# EAGLE board untitled2 (EAGLE 9.6.2)
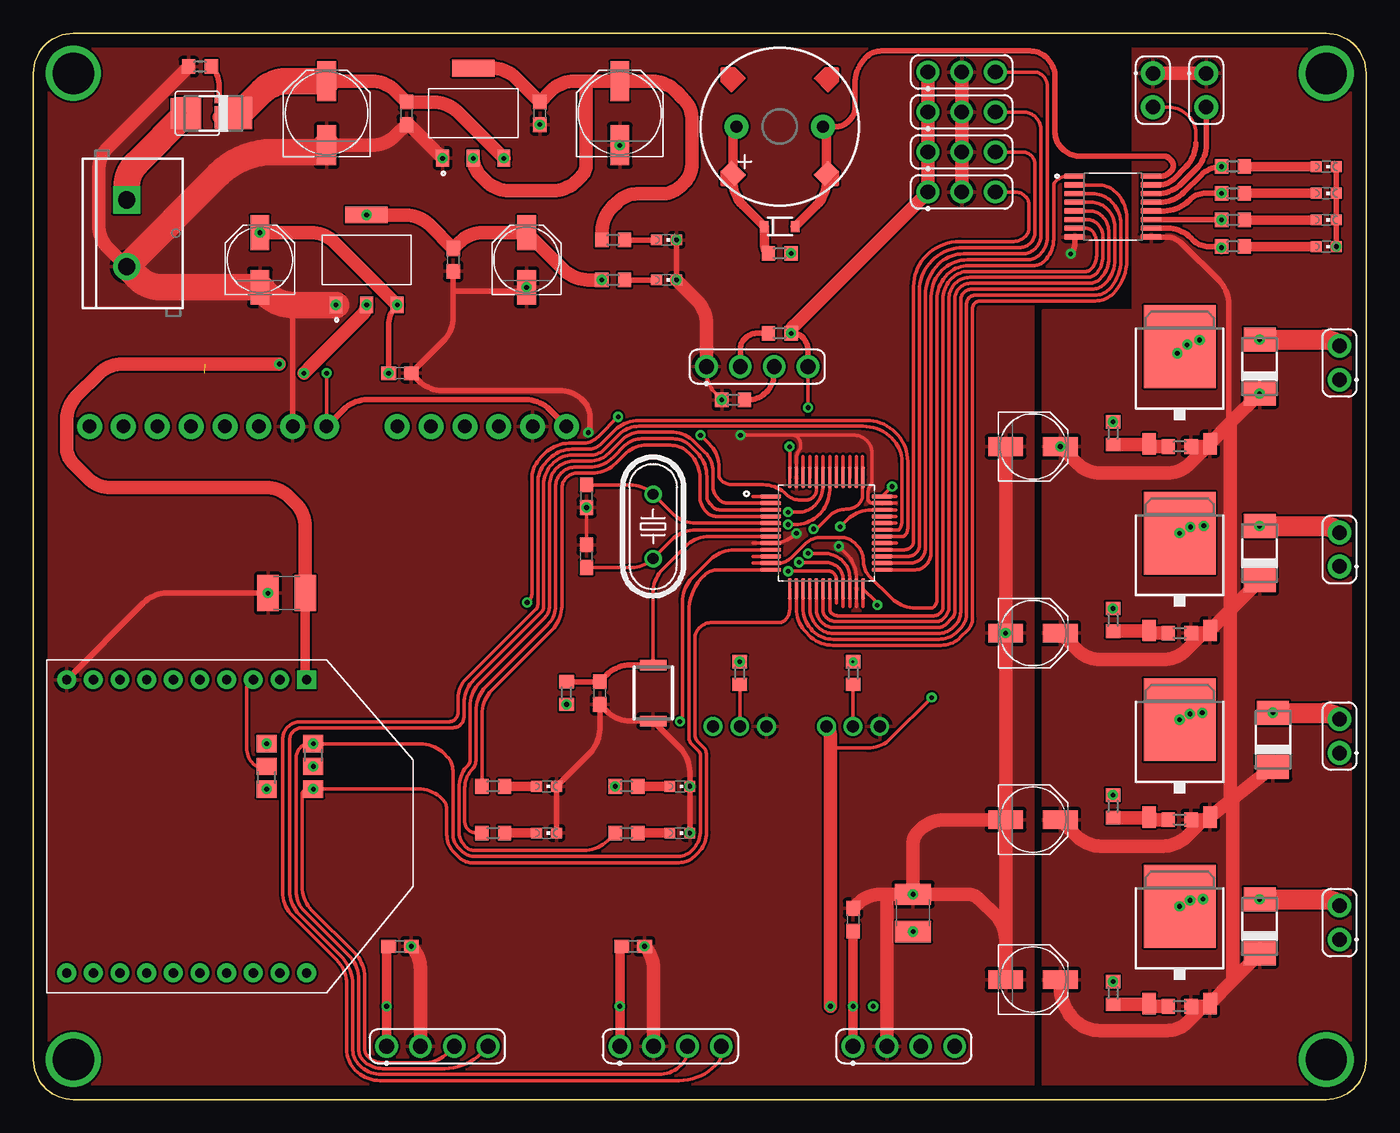
[diagram p0: board, top side]
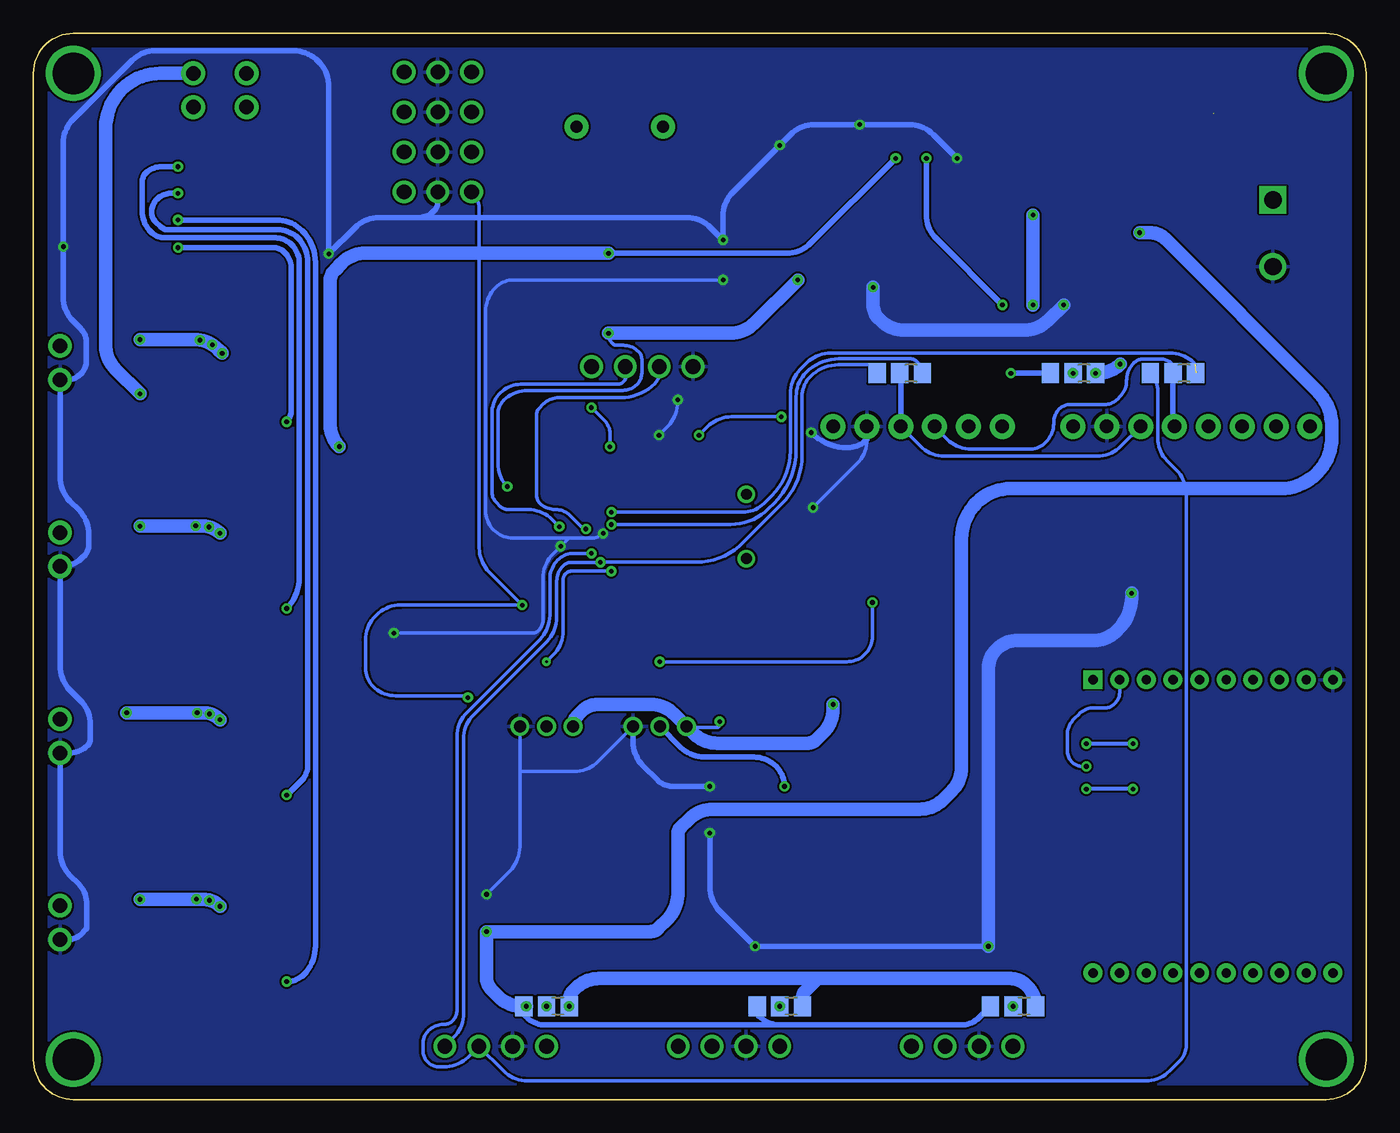
[diagram p1: board, bottom side, seen from below]

Size 100 x 80 mm. Coordinates in mm from the lower left corner, seen from the top.
Outline: 0,3 arc90 3,0 97,0 arc90 100,3 100,77 arc90 97,80 3,80 arc90 0,77 0,3
Copper layers (1*16): Top 0.035mm / dielectric 1.5mm / Bottom 0.035mm
Design rules "default": minimum track width 6mil, minimum drill 0.35mm, track to track 6mil, track to pad 6mil, pad to pad 6mil, via to via 6mil, smd to smd 6mil, copper to edge 40mil, drill to drill 6mil, minimum pad ring 10mil, minimum via ring 8mil, stop-mask expansion 4mil, vias tented up to drill 0mil, thermal gap 10mil

## Footprints (pad centres in the part's own frame; a part is rotated, then mirrored left to right if it is on the bottom)
C0603 = smd 1.1 x 1: 1 -0.85,0; 2 0.85,0
C1210 = smd 1.6 x 2.7: 1 -1.4,0; 2 1.4,0
PANASONIC_D = smd 3 x 1.4: + 2.4,0; - -2.4,0
PANASONIC_C = smd 2.6 x 1.4: + 2.05,0; - -2.05,0
0603_LED_GREEN = smd 0.8 x 0.8: A 0,-0.75; C 0,0.75
DO-214AC = smd 1.8 x 2.4: A 2.025,0; C -2.025,0
SOD-323 = smd 0.63 x 0.83: A 1.15,0; C -1.15,0
1X06_NO_SILK = drill 1.016 pad 1.88: 1 0,0; 2 2.54,0; 3 5.08,0; 4 7.62,0; 5 10.16,0; 6 12.7,0
1X08_NO_SILK = drill 1.016 pad 1.88: 1 0,0; 2 2.54,0; 3 5.08,0; 4 7.62,0; 5 10.16,0; 6 12.7,0; 7 15.24,0; 8 17.78,0
SCREWTERMINAL-5MM-2 = drill 1.3 pad 2.032 square: 1 0,0 | drill 1.3 pad 2.032: 2 5,0
A0R-JMP = smd 1.5 x 1.3: 1 0,1.7; 2 0,0; 3 0,-1.7
BUZZER-12MM = drill 0.9 pad 1.778: + 3.25,0; - -3.25,0
TO252 = smd 1 x 1.6: 1 -2.28,-4.8; 2 2.28,-4.8 | smd 5.4 x 6.2: 3 0,2.5
HC49U-V = drill 0.813: 1 -2.413,0; 2 2.413,0
DFN-8_3X3 = smd 2.29 x 2.29: D 0,0.8 | smd 0.4 x 0.7: G 0.96,-1.7 | smd 1.7 x 0.7: S -0.3,-1.7
R0603 = smd 1 x 1.1: 1 -0.85,0; 2 0.85,0
SKRK = smd 0.8 x 2: 1 -2.1,0; 2 2.1,0
QFP50P900X900X160-48N = smd 1.56 x 0.28: 1 -4.18,2.75; 2 -4.18,2.25; 3 -4.18,1.75; 4 -4.18,1.25; 5 -4.18,0.75; 6 -4.18,0.25; 7 -4.18,-0.25; 8 -4.18,-0.75; 9 -4.18,-1.25; 10 -4.18,-1.75; 11 -4.18,-2.25; 12 -4.18,-2.75; 25 4.18,-2.75; 26 4.18,-2.25; 27 4.18,-1.75; 28 4.18,-1.25; 29 4.18,-0.75; 30 4.18,-0.25; 31 4.18,0.25; 32 4.18,0.75; 33 4.18,1.25; 34 4.18,1.75; 35 4.18,2.25; 36 4.18,2.75 | smd 0.28 x 1.56: 13 -2.75,-4.18; 14 -2.25,-4.18; 15 -1.75,-4.18; 16 -1.25,-4.18; 17 -0.75,-4.18; 18 -0.25,-4.18; 19 0.25,-4.18; 20 0.75,-4.18; 21 1.25,-4.18; 22 1.75,-4.18; 23 2.25,-4.18; 24 2.75,-4.18; 37 2.75,4.18; 38 2.25,4.18; 39 1.75,4.18; 40 1.25,4.18; 41 0.75,4.18; 42 0.25,4.18; 43 -0.25,4.18; 44 -0.75,4.18; 45 -1.25,4.18; 46 -1.75,4.18; 47 -2.25,4.18; 48 -2.75,4.18
SOP65P640X120-16N = smd 1.57 x 0.41: 1 -2.87,2.275; 2 -2.87,1.625; 3 -2.87,0.975; 4 -2.87,0.325; 5 -2.87,-0.325; 6 -2.87,-0.975; 7 -2.87,-1.625; 8 -2.87,-2.275; 9 2.87,-2.275; 10 2.87,-1.625; 11 2.87,-0.975; 12 2.87,-0.325; 13 2.87,0.325; 14 2.87,0.975; 15 2.87,1.625; 16 2.87,2.275
SOT-223 = smd 0.96 x 1.26: 1 -2.3,-3.375; 2 0,-3.375; 3 2.3,-3.375 | smd 3.19 x 1.26: 4 0,3.375
1X3_2MM = drill 0.9 pad 1.32: P$1 0,0; P$2 2,0; P$3 4,0
HDRVR4W64P254_1X4_1016X240X800B = drill 1.105 pad 1.705: 1 0,0; 2 2.54,0; 3 5.08,0; 4 7.62,0
1X2 = drill 1.092 pad 1.778: P$1 0,0; P$2 2.54,0
XBEE = drill 0.7 pad 1.422 square: 1 -11,5.5 | drill 0.7 pad 1.422: 2 -11,3.5; 3 -11,1.5; 4 -11,-0.5; 5 -11,-2.5; 6 -11,-4.5; 7 -11,-6.5; 8 -11,-8.5; 9 -11,-10.5; 10 -11,-12.5; 11 11,-12.5; 12 11,-10.5; 13 11,-8.5; 14 11,-6.5; 15 11,-4.5; 16 11,-2.5; 17 11,-0.5; 18 11,1.5; 19 11,3.5; 20 11,5.5
HDRVR3W64P254_1X3_762X240X800B = drill 1.105 pad 1.705: 1 0,0; 2 2.54,0; 3 5.08,0
SMD_7.5_BUZZER = smd 1.55 x 1.2 rotated 45: + -3.5,3.5 | smd 1.55 x 1.2 rotated 135: - -3.5,-3.5

## Placement (x,y rotation side)
C1  1uf  [C0603]  42.5,30.5 270 top
C2  100nf  [C0603]  31.5,63 270 top
C3  100nf  [C0603]  38,74 270 top
C4  100uf  [C1210]  66,14 90 top
C5  100uf  [C1210]  19,38 180 top
C6  100nf  [C0603]  27.5,54.5 0 top
C7  100uf  [PANASONIC_D]  44,74 90 top
C8  47uf  [PANASONIC_C]  37,63 90 top
C9  100nf  [C0603]  28,74 270 top
C10  100uf  [PANASONIC_D]  22,74 90 top
C11  100nf  [C0603]  61.5,13.5 270 top
C12  47uf  [PANASONIC_C]  17,63 90 top
C14  CAPACITOR_POLC  [PANASONIC_C]  75,21 0 top
C16  CAPACITOR_POLC  [PANASONIC_C]  75,9 0 top
C18  CAPACITOR_POLC  [PANASONIC_C]  75,49 0 top
C29  CAPACITOR_POLC  [PANASONIC_C]  75,35 0 top
C30  100nf  [C0603]  45,11.5 180 top
C31  22pf  [C0603]  41.5,40.77 90 top
C32  100nf  [C0603]  27.5,11.5 180 top
C33  22pf  [C0603]  41.5,45.27 270 top
D1  Red  [0603_LED_GREEN]  47.5,64.5 270 top
D2  ss36  [DO-214AC]  93,27 90 top
D3  [SOD-323]  56,65.5 0 top
D4  ss36  [DO-214AC]  92,41 90 top
D5  ss36  [DO-214AC]  13.5,74 180 top
D6  ss36  [DO-214AC]  92,13 90 top
D7  ss36  [DO-214AC]  92,55 90 top
D11  Red  [0603_LED_GREEN]  47.5,61.5 270 top
J1  [1X06_NO_SILK]  40,50.5 180 top
J2  [1X08_NO_SILK]  22,50.5 180 top
J9  [SCREWTERMINAL-5MM-2]  7,67.5 270 top
JMP1  0R-JUMPA  [A0R-JMP]  35,54.5 270 bottom
JMP2  0R-JUMPA  [A0R-JMP]  14.5,54.5 270 bottom
JMP5  0R-JUMPA  [A0R-JMP]  22,54.5 270 bottom
JMP6  0R-JUMPA  [A0R-JMP]  21,25 0 top
JMP7  0R-JUMPA  [A0R-JMP]  17.5,25 180 top
JMP8  0R-JUMPA  [A0R-JMP]  26.5,7 270 bottom
JMP9  0R-JUMPA  [A0R-JMP]  44,7 270 bottom
JMP10  0R-JUMPA  [A0R-JMP]  61.5,7 270 bottom
L1  PC13  [0603_LED_GREEN]  48.5,20 270 top
L2  PC13  [0603_LED_GREEN]  48.5,23.5 270 top
L3  PC13  [0603_LED_GREEN]  38.5,20 270 top
L5  PC13  [0603_LED_GREEN]  38.5,23.5 270 top
L6  Blue  [0603_LED_GREEN]  97,64 270 top
L7  Blue  [0603_LED_GREEN]  97,66 270 top
L8  Blue  [0603_LED_GREEN]  97,68 270 top
L9  Blue  [0603_LED_GREEN]  97,70 270 top
LS1  BUZZER-PTH  [BUZZER-12MM]  56,73 180 top
Q1  FDD4141TO252  [TO252]  86,40 0 top
Q2  [HC49U-V]  46.5,43 90 top
Q3  FDD4141TO252  [TO252]  86,26 0 top
Q4  FDD4141TO252  [TO252]  86,12 0 top
Q5  FDD4141TO252  [TO252]  86,54 0 top
Q6  AON7401  [DFN-8_3X3]  12.25,74 90 top
R1  10K  [R0603]  53,32 270 top
R2  100K  [R0603]  61.5,32 90 top
R3  10K  [R0603]  40,30.5 270 top
R4  10K  [R0603]  56,57.5 180 top
R5  10K  [R0603]  52.5,52.5 0 top
R6  1K  [R0603]  43.5,64.5 180 top
R7  22r  [R0603]  12.5,77.5 180 top
R12  1K  [R0603]  43.5,61.5 180 top
R14  1K  [R0603]  34.5,20 180 top
R15  47K  [R0603]  86,21 0 top
R16  150r  [R0603]  81,22 90 top
R17  47K  [R0603]  86,7 0 top
R18  150r  [R0603]  81,8 90 top
R19  47K  [R0603]  86,49 0 top
R20  150r  [R0603]  81,50 90 top
R21  1K  [R0603]  44.5,20 180 top
R22  1K  [R0603]  44.5,23.5 180 top
R23  1K  [R0603]  34.5,23.5 180 top
R24  10K  [R0603]  90,64 180 top
R25  10K  [R0603]  90,66 180 top
R26  10K  [R0603]  90,68 180 top
R27  10K  [R0603]  90,70 180 top
R40  220R  [R0603]  56,63.5 0 top
R41  47K  [R0603]  86,35 0 top
R42  150r  [R0603]  81,36 90 top
S1  RESET  [SKRK]  46.5,30.5 90 top
U1  STM32F103C8T6  [QFP50P900X900X160-48N]  59.5,42.5 0 top
U3  ULN2003APW  [SOP65P640X120-16N]  81,67 0 top
U4  1117_3V3  [SOT-223]  25,63 0 top
U6  1117_3V3  [SOT-223]  33,74 0 top
U$1  FML_1X32MM  [1X3_2MM]  59.5,28 0 top
U$2  FML_1X32MM  [1X3_2MM]  51,28 0 top
U$3  FML_1X4  [HDRVR4W64P254_1X4_1016X240X800B]  50.5,55 0 top
U$4  1X2  [1X2]  98,26 90 top
U$5  1X2  [1X2]  98,12 90 top
U$6  1X2  [1X2]  98,54 90 top
U$7  FML_1X4  [HDRVR4W64P254_1X4_1016X240X800B]  61.5,4 0 top
U$8  XBEE  [XBEE]  15,20.5 270 top
U$9  Z_STOP  [HDRVR3W64P254_1X3_762X240X800B]  67.11,68.1 0 top
U$11  FML_1X4  [HDRVR4W64P254_1X4_1016X240X800B]  26.5,4 0 top
U$12  FML_1X4  [HDRVR4W64P254_1X4_1016X240X800B]  44,4 0 top
U$13  Z_STOP  [HDRVR3W64P254_1X3_762X240X800B]  67.11,71.1 0 top
U$14  Y_STOP  [HDRVR3W64P254_1X3_762X240X800B]  67.11,74.1 0 top
U$15  X_STOP  [HDRVR3W64P254_1X3_762X240X800B]  67.11,77.1 0 top
U$19  7.5X7.5_BUZZER  [SMD_7.5_BUZZER]  56,73 90 top
U$20  1X2  [1X2]  84,77 270 top
U$21  1X2  [1X2]  98,40 90 top
U$22  1X2  [1X2]  88,77 270 top

## Library data of the parts
C1-C12 C14 C16 C18 C29-C33 D1 D2 D4-D7 D11 L1-L3 L5-L9 R1-R7 R12 R14-R27 R40-R42 = pasif_com1
D3 = BeagleBone_Blue_R3; PROD_ID: DIO-09646
J1 = SparkFun-Connectors
J2 = SparkFun-Connectors; PROD_ID: CONN-08438
J9 = SparkFun-Connectors; SF_SKU: PRT-08432
JMP1 JMP2 JMP5-JMP10 = jump-0r-smd
LS1 = SparkFun-Electromechanical; PROD_ID: COMP-08253; SF_SKU: COM-07950
Q1 Q3-Q5 = transistor-fet
Q2 = crystal; OC_FARNELL: 1666969; OC_NEWARK: unknown
Q6 = AON7401
S1 = SKRKAEE010; AVAILABILITY: Unavailable; DESCRIPTION: Switch Tactile N.O. SPST Round Button Gull Wing 0.05A 12VDC 1.57N SMD T/R; MF: ALPS; MP: SKRKAEE010; PACKAGE: None; PRICE: None
U1 = STM32F103C8T6; AVAILABILITY: Unavailable; DESCRIPTION: Mainstream Performance line, ARM Cortex-M3 MCU with 64 Kbytes Flash, 72 MHz CPU, motor control, USB and CAN; MF: STMicroelectronics; MP: STM32F103C8T6; PACKAGE: LQFP-48 STMicroelectronics; PRICE: None
U3 = ULN2003APW; AVAILABILITY: Good; DESCRIPTION: 50-V, 7-ch darlington transistor array, -20C to 70C 16-TSSOP -40 to 70; MF: Texas Instruments; MP: ULN2003APW; PACKAGE: TSSOP-16 Texas Instruments; PRICE: None; PURCHASE-URL: https://pricing.snapeda.com/search/part/ULN2003APW/?ref=eda
U4 U6 = IC; CREATED_BY: PCBLayout.com; DIGIKEY_PART_NUMBER: NCP1117ST33T3GOSTR-ND; MANUFACTURER: ON Semiconductor; MPN: NCP1117ST33T3G; PACKAGE: SOT-223
U$1-U$7 U$9 U$11-U$15 U$20-U$22 = header_3d
U$8 = adafruit
U$19 = buzzer_smd_no_drill

## Nets
3V3: C2.1 C5.1 C8.+ JMP5.1 JMP8.1 JMP9.1 JMP10.1 R3.2 R4.1 R12.2 U1.9 U1.24 U1.36 U1.48 U4.2 U4.4 U$1.P$1 U$2.P$1 U$3.4 U$8.1 U$9.1 U$13.1 U$14.1 U$15.1
BOOT: R1.2 R22.2 U$2.P$2
BOOT0: R1.1 U1.44
BOOT1: R2.2 U1.20
BRN1: R27.2 R42.2 U3.13
BRN2: R16.2 R26.2 U3.12
BRN3: R18.2 R25.2 U3.11
BRN4: R20.2 R24.2 U3.10
BURN1: U1.16 U3.4
BURN2: U1.17 U3.5
BURN3: U1.18 U3.6
BURN4: U1.19 U3.7
BUZZER: U1.11 U3.1
GND: C1.2 C2.2 C3.2 C4.2 C5.2 C6.2 C7.- C8.- C9.2 C10.- C11.1 C12.- C14.- C16.- C18.- C29.- C30.1 C31.2 C32.1 C33.2 D1.C D11.C J1.2 J2.2 J9.2 L1.C L2.C L3.C L5.C L6.C L7.C L8.C L9.C R5.1 R7.2 S1.1 U1.8 U1.23 U1.35 U1.47 U3.8 U4.1 U6.1 U$1.P$3 U$2.P$3 U$3.1 U$4.P$1 U$5.P$1 U$6.P$1 U$7.2 U$8.10 U$9.2 U$11.2 U$12.2 U$13.2 U$14.2 U$15.2 U$21.P$1
N$2: Q6.G R7.1
N$5: R2.1 U$1.P$2
N$7: D1.A R6.1
N$8: D11.A R12.1
N$9: JMP6.2 U$8.2
N$10: JMP7.2 U$8.3
N$11: C30.2 JMP9.2 U$12.1
N$12: L3.A R14.1
N$13: D2.A Q3.3 U$4.P$2
N$14: Q3.1 R15.1 R16.1
N$15: D6.A Q4.3 U$5.P$2
N$16: Q4.1 R17.1 R18.1
N$17: D7.A Q5.3 U$6.P$2
N$18: Q5.1 R19.1 R20.1
N$19: C33.1 Q2.2 U1.5
N$20: C31.1 Q2.1 U1.6
N$21: L1.A R21.1
N$22: L2.A R22.1
N$23: L5.A R23.1
N$24: L6.A R24.1
N$25: L7.A R25.1
N$26: L8.A R26.1
N$27: L9.A R27.1
N$28: C11.2 JMP10.2 U$7.1
N$29: J1.1 J2.1 JMP5.2
N$30: J1.3 J2.3 JMP1.2
N$31: J1.4 J2.4 JMP2.2
N$49: C32.2 JMP8.2 U$11.1
N$59: D5.A J9.1 Q6.D
N$71: U3.15 U$20.P$2
N$72: U3.14 U$22.P$2
N$76: D3.A LS1.- U3.16 U$19.-
N$77: D3.C LS1.+ R40.1 U$19.+
N$78: D4.A Q1.3 U$21.P$2
N$79: Q1.1 R41.1 R42.1
PA0: U1.10
PA8: U1.29
PA11: U1.32
PA12: U1.33
PA13: R5.2 U1.34 U$3.3
PA14: R4.2 U1.37 U$3.2
PA15: U1.38
PB3: U1.39
PB4: U1.40
PB5: U1.41
PB8: U1.45
PB9: U1.46
PB12: U1.25 U$15.3
PB13: U1.26 U$14.3
PB14: U1.27 U$13.3
PB15: U1.28 U$9.3
PC13: R21.2 U1.2
PC14: R14.2 U1.3
PC15: R23.2 U1.4
RESET: U$8.5
RST: C1.1 R3.1 S1.2 U1.7
RX1: U1.31 U$12.3
RX2: JMP6.3 JMP7.1 U1.13 U$11.3
SCL1: JMP1.1 U1.42
SCL2/TX3: JMP1.3 U1.21 U$7.4
SDA1: JMP2.1 U1.43
SDA2/RX3: JMP2.3 U1.22 U$7.3
TX1: U1.30 U$12.4
TX2: JMP6.1 JMP7.3 U1.12 U$11.4
UL2: U1.14 U3.2
UL3: U1.15 U3.3
VBAT: U1.1
VCC: C3.1 C4.1 C6.1 C7.+ C12.+ JMP5.3 JMP8.3 JMP9.3 JMP10.3 R6.2 U4.3 U6.2 U6.4
VIN: C9.1 C10.+ C14.+ C16.+ C18.+ C29.+ D2.C D4.C D5.C D6.C D7.C Q1.2 Q3.2 Q4.2 Q5.2 Q6.S R15.2 R17.2 R19.2 R40.2 R41.2 U3.9 U6.3 U$20.P$1 U$22.P$1

## Tracks (layer width: path | path; a pad name or v marks a point on that pad's centre or on a via)
3V3  (via drill 0.35)
  Top 0.28: 64.73,45.25 U1.36 64.42,45.99 arc-45 v64.44,46 | 62.25,37 U1.24 63.21,37.36 arc-45 v63.32,37.1 | 54,41.25 U1.9 52.59,41.25 arc45 50.8,40.51 49.43,39.14 arc45 48.69,37.35 48.69,28.8 arc-45 v48.51,28.36 | v56.74,48.98 arc45 56.75,48.96 U1.48 | v58.13,51.92 58.13,54.98 arc45 U$3.4 | v67.4,30.16 64.32,27.08 arc-45 62.61,26.37 59.99,26.37 arc45 59.8,26.29
  Top 0.4: R4.1 57.02,57.5 arc-45 57.7,57.22 arc-45 58.12,56.21 U$3.4 | U4.2 20.6,55.23 arc45 JMP5.1
  Top 0.7: C5.1 20.4,31.74 arc45 U$8.1
  Top 1: U4.4 27.92,66.38 arc-45 29.72,65.63 C2.1 31.96,64.31 arc-45 33.75,65.05 C8.+ 39.81,62.24 arc45 41.6,61.5 R12.2 | U$15.1 U$14.1 U$13.1 U$9.1 57.09,58.08 arc45 R4.1 | JMP5.1 24.7,58.9 arc45 U4.2 | U$1.P$1 arc-45 59.8,27.28 59.8,26.29 JMP10.1 | v18.46,55.18 6.7,55.18 arc45 4.91,54.44 3.23,52.76 arc45 2.49,50.97 2.49,49.01 arc45 3.06,47.63 4.03,46.66 arc45 5.82,45.92 17.45,45.92 arc-45 19.24,45.18 19.66,44.76 arc-45 20.4,42.97 C5.1
  Bottom 0.28: v56.74,48.98 56.74,49.99 arc-45 57.12,50.91 v58.13,51.92 | v67.4,30.16 arc-45 67.74,30.3 72.82,30.3 arc45 74.51,31 arc45 75.07,32.35 75.07,34.49 arc45 74.33,36.28 74.25,36.36 arc45 72.46,37.1 v63.32,37.1 65.8,39.58 arc45 66.54,41.37 66.54,66.72 arc-45 U$9.1 | v64.44,46 arc45 65.14,47.69 65.14,51.45 arc45 64.73,52.44 64.7,52.47 arc45 62.91,53.21 55.77,53.21 arc-45 54.71,53.65 arc-45 54.35,54.52 54.35,55.55 arc-45 54.58,56.11 54.59,56.12 arc-45 55.73,56.59 56.21,56.59 arc45 56.55,56.73 arc45 56.85,57.45 R4.1 | U$2.P$1 50.91,27.91 48.65,27.91 48.51,28.05 v48.51,28.36
  Bottom 0.4: 25.42,8.5 25.5,8.58 | 40.81,9.08 arc-45 41.41,8.83 | 42.3,7.52 JMP9.1 | 59.33,8.34 59.43,8.24 | 59.8,7.35 JMP10.1
  Bottom 1: JMP8.1 arc-45 25.42,8.5 | 25.5,8.58 arc-45 26.71,9.08 40.81,9.08 57.54,9.08 arc-45 59.33,8.34 | 41.41,8.83 42,8.24 arc-45 42.3,7.52 | 59.43,8.24 arc-45 59.8,7.35 | U4.2 U4.4 | R12.2 45.91,58.24 arc45 47.7,57.5 R4.1 | U$1.P$1 arc45 59.15,28.84 58.85,29.14 arc45 57.62,29.65 53.7,29.65 arc45 51.91,28.91 U$2.P$1 50.47,27.47 arc-45 48.68,26.73 41.96,26.73 arc-45 41.21,27.04 40.74,27.51 arc-45 40,29.3 R3.2 | JMP5.1 20.1,54.5 arc-45 v18.46,55.18
  other vias: 20.3,54.5 25,59.62 25,66.38 42.65,61.5 56.85,57.5 59.8,7 40,29.65
BOOT  (via drill 0.35)
  Top 0.28: U$2.P$2 R1.2
  Bottom 0.4: U$2.P$2 51.43,26.43 arc-45 49.64,25.69 45.95,25.69 arc45 44.26,24.99 arc45 43.65,23.52 R22.2
  other vias: 43.65,23.5
BOOT0  (via drill 0.35)
  Top 0.28: 58.75,48.25 U1.44 58.75,45.73 arc-45 58.54,45.22 arc-45 57.96,44.98 57.54,44.98 arc-45 56.5,45.41 arc45 54.76,46.13 52.42,46.13 arc-45 51.6,46.47 arc-45 51.44,46.86 51.44,47.42 arc45 50.7,49.21 v50.06,49.85 | v43.88,51.23 42.41,49.76 arc-45 41.16,49.24 40.19,49.24 arc45 38.4,48.5 38.07,48.17 arc45 37.4,46.55 37.4,37.9 arc-45 37.23,37.49 v37.04,37.3
  Bottom 0.28: v50.06,49.85 49.42,50.48 arc45 47.63,51.23 v43.88,51.23 | v37.04,37.3 37.04,34.75 arc45 37.59,33.42 arc45 38.96,32.85 R1.1
  other vias: 53,32.85
BOOT1  (via drill 0.22, 0.35)
  Top 0.28: U1.20 60.25,38.82 | v56.64,39.64 59.73,39.64 arc-45 60.04,39.51 arc-45 60.25,39 U1.20 | U1.20 60.25,37.25
  Bottom 0.28: v56.64,39.64 59.65,39.64 arc-45 60.04,39.48 60.05,39.47 arc-45 60.25,38.99 60.25,35.15 arc45 60.99,33.36 R2.2
  other vias: 61.5,32.85
BRN1  (via drill 0.35)
  Top 0.4: U3.13 84.52,67.33 arc45 86.32,68.07 87.61,69.36 arc-45 R27.2
  Bottom 0.4: 91.19,65.1 arc45 91.83,66.64 91.83,68.86 arc45 91.56,69.51 arc45 90.38,70 R27.2 | 91.19,65.1 91.17,65.08 | R42.2 arc-45 80.04,39.17 80.04,62.73 arc-45 80.62,64.14 80.64,64.16 arc-45 81.83,64.65 90.1,64.65 arc45 91.19,65.1
  other vias: 89.15,70 81,36.85
BRN2  (via drill 0.35)
  Top 0.4: U3.12 84.87,66.67 arc45 86.67,67.42 86.75,67.5 arc-45 87.96,68 R26.2
  Bottom 0.4: R26.2 89.66,68 arc-45 90.72,67.56 arc-45 91.13,66.57 | 91.13,66.57 91.13,66.38 | R16.2 80.95,22.85 79.94,23.86 arc-45 79.41,25.13 79.41,62.86 arc-45 80.15,64.64 arc-45 81.65,65.26 89.89,65.26 arc45 90.45,65.49 90.85,65.89 arc45 91.13,66.57
  other vias: 89.15,68 81,22.85
BRN3  (via drill 0.35)
  Top 0.4: U3.11 89.09,66.03 arc-45 R25.2
  Bottom 0.4: R18.2 80.96,8.85 arc-45 79.73,9.36 arc-45 78.83,11.53 78.83,62.79 arc-45 79.82,65.19 arc-45 81.78,66 R25.2
  other vias: 89.15,66 81,8.85
BRN4  (via drill 0.35)
  Top 0.4: U3.10 85.07,65.38 arc-45 86.87,64.63 87,64.5 arc45 88.21,64 R24.2 | R24.2 | 89.14,63.64 v89.14,63.92 R24.2
  Bottom 0.4: R20.2 arc-45 80.64,51.72 80.64,62.3 arc-45 81.17,63.58 arc-45 82.01,63.93 89.11,63.93 arc-45 v89.14,63.92
  other vias: 81,50.85
BURN1
  Top 0.28: U1.16 58.25,36.94 arc45 58.87,35.44 arc45 60,34.97 67.9,34.97 arc45 69.01,35.43 69.18,35.6 arc45 69.58,36.57 69.58,59.99 arc-45 69.81,60.54 arc-45 70.45,60.81 79.43,60.81 arc45 80.41,61.21 arc45 81.15,63.01 81.15,65.46 arc45 80.59,66.81 arc45 79.35,67.33 U3.4
BURN2
  Top 0.28: U1.17 58.75,36.75 arc45 59.13,35.83 59.18,35.78 arc45 60.08,35.41 67.87,35.41 arc45 68.47,35.66 68.94,36.12 arc45 69.14,36.62 69.14,60.08 arc-45 69.47,60.87 arc-45 70.38,61.25 79.24,61.25 arc45 80.06,61.59 arc45 80.7,63.14 80.7,65.05 arc45 80.19,66.29 arc45 79.26,66.67 U3.5
BURN3
  Top 0.28: U3.6 79.09,66.03 arc-45 79.83,65.72 arc-45 80.25,64.7 80.25,63.26 arc-45 79.7,61.94 arc-45 79.1,61.69 70.25,61.69 arc45 69.18,61.25 arc45 68.69,60.05 68.69,36.91 arc-45 68.4,36.21 68.27,36.08 arc-45 67.74,35.86 60.24,35.86 arc-45 59.47,36.18 arc-45 59.25,36.71 U1.18
BURN4
  Top 0.28: U3.7 78.95,65.38 arc-45 79.41,65.19 arc-45 79.78,64.28 79.78,63.34 arc-45 79.35,62.29 arc-45 78.96,62.13 70.14,62.13 arc45 68.9,61.62 arc45 68.25,60.05 68.25,36.96 arc-45 68.07,36.52 68.04,36.49 arc-45 67.58,36.3 60.34,36.3 arc-45 59.89,36.49 arc-45 59.75,36.82 U1.19
BUZZER
  Top 0.28: U3.1 77.61,69.28 arc45 76.71,68.9 arc45 76.55,68.51 76.55,64.56 arc-45 75.87,62.92 arc-45 75.03,62.57 70.15,62.57 arc45 68.58,61.92 arc45 67.8,60.03 67.8,37.5 arc-45 67.6,37.01 67.45,36.87 66.2,36.87 arc-45 64.4,37.61 62.71,39.3 arc-45 62.29,40.31 62.29,40.34 arc45 61.76,41.62 61.63,41.75 arc45 60.59,42.18 59.16,42.18 arc45 57.81,41.62 56.83,40.64 arc-45 55.89,40.25 U1.11 54,40.25
GND  (via drill 0.35)
  Top 0.25: U1.35 62.99,44.75 arc-45 62.7,44.87 arc-45 62.63,45.04 62.63,45.62 arc-45 62.81,46.05 arc45 62.91,46.29 62.91,48.53 arc45 62.54,49.43 arc45 61.52,49.85 56.99,49.85 | U1.8 55.49,41.75 arc45 v57.25,42.48
  Top 0.28: C33.2 C31.2 | U1.47 57.25,48.11 | 57.25,48.11 57.25,48.25 | U1.35 64.73,44.75 | 61.75,37 U1.23 61.75,39.14 arc45 61.01,40.93 v60.43,41.51 | U1.8 54,41.75 | 57.25,48.11 arc-45 57.56,48.85 57.56,49.16 arc45 57.33,49.71 arc45 56.99,49.85 v53.06,49.85 arc-45 53.33,49.96 | U$3.1 50.5,54.7 arc45 51.24,52.91 R5.1
  Top 0.4: L3.C L5.C 41.76,26.01 arc45 42.5,27.8 C1.2 43.01,29.14 arc45 44.8,28.4 S1.1 48.51,26.39 arc-45 49.25,24.6 L2.C L1.C | U$8.10 8.26,37.26 arc-45 10.05,38 C5.2 | J2.2 19.46,59.42 arc45 19.38,59.62 | D11.C D1.C | L9.C L8.C L7.C L6.C | 31.5,60.67 31.5,58.7 arc-45 30.76,56.91 C6.2 28.91,53.94 arc45 30.7,53.2 39.46,53.2 arc-45 41.25,52.46 arc-45 41.76,51.23 41.76,50.22 arc-45 41.72,50.12 v41.64,50.04 | 31.5,60.67 C2.2 | C8.- arc-45 36.32,60.67 31.5,60.67 | U3.8 78.13,64.18 arc-45 v77.83,63.46
  Top 1: C10.- 25.4,71.6 arc45 27.19,72.34 C9.2 arc-45 28.3,73.03 U6.1 | R7.2 5.65,71.5 arc45 4.91,69.71 4.91,65.64 arc45 5.65,63.85 J9.2 | C32.1 arc-45 29.04,9.83 U$11.2 | C30.1 arc-45 46.54,9.83 U$12.2 | C11.1 61.81,14.66 arc-45 63.6,15.4 64.1,15.4 | 64.1,15.4 C4.2 | U$7.2 64.04,15.26 arc-45 64.1,15.4 | C16.- 72.95,12.02 | 72.95,12.02 arc45 72.21,13.81 71.03,14.99 arc45 70.04,15.4 C4.2 | C4.2 66,19.19 arc-45 66.37,20.08 66.55,20.26 arc-45 68.34,21 C14.- | U$9.2 U$13.2 U$14.2 U$15.2 | U$3.1 50.5,58.2 arc45 49.76,59.99 D11.C | C18.- C29.- C14.- | 72.95,12.02 C14.-
  Top 2: U4.1 19.38,59.62 arc-45 17.58,60.37 C12.- 9.6,60.95 arc-45 7.81,61.69 J9.2 13.91,69.41 arc-45 17.99,71.1 21.5,71.1 C10.-
  Bottom 0.25: v57.25,42.48 arc45 58.09,42.13 59.83,42.13 | D11.C 63.97,61.5 arc-45 65.3,60.95 65.32,60.93 arc-45 66.06,59.14 66.06,44.18 arc-45 65.46,42.73 arc-45 64.01,42.13 59.83,42.13 | v60.43,41.51 59.84,42.09 arc-45 59.83,42.13
  Bottom 0.28: U$1.P$3 63.5,24.62 | 63.5,24.62 63.5,18.95 arc45 64.24,17.16 C4.2 | U$2.P$3 57.64,25.36 arc45 59.43,24.62 63.5,24.62 | J1.2 37.46,49.51 arc45 38.2,47.72 C33.2 | v53.06,49.85 52.39,50.52 arc-45 51.65,52.31 R5.1 | v60.43,41.51 61.01,40.93 arc-45 61.75,39.14 61.75,36.02 arc45 62.1,35.18 arc45 62.53,35 C29.-
  Bottom 0.4: L1.C 49.25,15.95 arc-45 48.51,14.16 C30.1 C32.1 | U$5.P$1 97.35,12 arc-45 96.46,12.37 96.08,12.75 arc-45 95.98,12.99 95.98,14.66 arc-45 96.61,16.18 97.26,16.83 arc45 98,18.62 U$4.P$1 97.28,26 arc-45 95.93,26.56 arc-45 95.73,27.04 95.73,28.16 arc-45 96.47,29.95 97.26,30.74 arc45 98,32.53 U$21.P$1 arc-45 96.24,40.73 96.17,40.8 arc-45 95.83,41.62 95.83,42.42 arc-45 96.57,44.21 97.26,44.9 arc45 98,46.69 U$6.P$1 97.49,54 arc-45 96.45,54.43 96.42,54.46 arc-45 96.02,55.43 96.02,56.8 arc-45 96.45,57.84 97.01,58.4 arc45 97.75,60.19 L6.C 97.75,71.76 arc45 97.01,73.55 92.56,78 arc45 90.89,78.69 80.5,78.69 arc45 78.63,77.92 arc45 77.83,75.99 v77.83,63.46 75.86,65.43 arc45 74.07,66.17 71.15,66.17 | U6.1 32.48,72.41 arc-45 34.28,73.15 C3.2 41.4,73.15 arc-45 43.19,72.41 C7.- 47.51,68.09 arc-45 48.25,66.3 D1.C 49.18,65.43 arc-45 50.97,66.17 71.15,66.17 | 71.15,66.17 arc-45 69.92,66.68 arc-45 69.65,67.33 U$9.2 | U$2.P$3 55,26.84 arc-45 54.26,25.05 53.18,23.97 arc-45 52.05,23.5 L2.C | v41.64,50.04 arc-45 38.91,48.91 arc-45 37.46,49.51
  Bottom 1: U4.1 23.86,58.46 arc45 25.66,57.72 34.65,57.72 arc45 36.44,58.46 36.57,58.59 arc45 37,59.63 C8.- | C32.1 28.35,32.31 arc45 27.74,33.78 arc45 26.13,34.45 20.41,34.45 arc-45 18.76,35.13 18.58,35.31 arc-45 17.6,37.67 C5.2
  other vias: 45.85,11.5 49.25,20 66,15.4 97.75,64 41.5,44.42 44,71.6 38,73.15 30.7,70.62 48.25,64.5 22.7,59.62 22.7,59.62 37,60.95 28.35,11.5 51.65,52.5 49.25,23.5 17.6,38 72.95,35 48.25,61.5
  pour Bottom: -5.17,82.53 -5.17,-4.32 104.87,-4.32 104.87,82.53
  pour Top: -5.15,82.47 -5.15,-1.62 75,-1.62 75,59.69 81.99,59.69 81.99,81.25 78.83,81.25
N$1  (via drill 3.1)
  other vias: 97,77
N$2
  Top 0.4: Q6.G 13.95,76.05 arc45 R7.1
N$3  (via drill 3.1)
  other vias: 97,3
N$4  (via drill 3.1)
  other vias: 3,3
N$5
  Top 0.28: U$1.P$2 R2.1
N$6  (via drill 3.1)
  other vias: 3,77
N$7
  Top 0.4: R6.1 D1.A
N$8
  Top 0.4: D11.A R12.1
N$9  (via drill 0.35)
  Bottom 0.28: JMP6.2 21.34,25 arc45 22.04,25.29 arc45 22.43,26.23 22.43,27.28 arc45 21.89,28.59 21.57,28.91 arc45 20.41,29.39 19.53,29.39 arc-45 18.98,29.62 18.79,29.81 arc-45 18.5,30.51 U$8.2
  other vias: 21,25
N$10
  Top 0.28: JMP7.2 16.92,25 arc-45 16.51,25.17 arc-45 16.01,26.38 16.01,30.88 arc-45 16.1,31.1 U$8.3
N$11  (via drill 0.35)
  Top 0.7: U$12.1 JMP9.2 44,11.14 arc-45 C30.2
  other vias: 44,7
N$12
  Top 0.7: R14.1 L3.A
N$13  (via drill 0.35)
  Top 1.5: D2.A 96.83,29.02 arc-45 U$4.P$2
  Bottom 1: Q3.3 arc-45 87.27,29.02 D2.A
  other vias: 86,28.5 93,29.02
N$14
  Top 1: R15.1 84.2,21 arc-45 Q3.1 arc-45 83.6,21.15 R16.1
N$15  (via drill 0.35)
  Top 1.5: D6.A 96.83,15.03 arc-45 U$5.P$2
  Bottom 1: Q4.3 arc-45 87.27,15.03 D6.A
  other vias: 86,14.5 92,15.03
N$16
  Top 1: R17.1 84.2,7 arc-45 Q4.1 arc-45 83.6,7.15 R18.1
N$17  (via drill 0.35)
  Top 1: Q5.3 86,56.4 arc-45 v85.83,55.99
  Top 1.5: D7.A 96.83,57.02 arc-45 U$6.P$2
  Bottom 1: v85.83,55.99 86.12,56.28 arc-45 87.92,57.02 D7.A
  other vias: 92,57.02
N$18
  Top 1: R19.1 84.2,49 arc-45 Q5.1 arc-45 83.6,49.15 R20.1
N$19
  Top 0.28: U1.5 49.72,43.25 arc-45 47.92,43.99 Q2.2 arc45 44.79,46.12 C33.1
N$20
  Top 0.28: U1.6 49.72,42.75 arc45 47.92,42.01 Q2.1 arc-45 44.89,39.92 C31.1
N$21
  Top 0.7: R21.1 L1.A
N$22
  Top 0.7: R22.1 L2.A
N$23
  Top 0.7: R23.1 L5.A
N$24
  Top 0.7: R24.1 L6.A
N$25
  Top 0.7: R25.1 L7.A
N$26
  Top 0.7: R26.1 L8.A
N$27
  Top 0.7: R27.1 L9.A
N$28  (via drill 0.35)
  Top 0.7: U$7.1 JMP10.2 C11.2
  other vias: 61.5,7
N$29  (via drill 0.35)
  Top 0.28: J2.1 JMP5.2
  Top 0.4: J1.1 38.73,51.77 arc45 36.94,52.51 25.06,52.51 arc45 23.27,51.77 J2.1
  other vias: 22,54.5
N$30
  Bottom 0.28: J1.3 33.44,49.02 arc-45 31.65,48.28 20.19,48.28 arc-45 18.4,49.02 J2.3
  Bottom 0.4: J1.3 34.92,54.31 arc-45 JMP1.2
N$31
  Bottom 0.28: J1.4 31.41,49.53 arc-45 29.62,48.79 25.31,48.79 arc-45 24.03,49.32 arc-45 23.45,50.72 23.45,50.81 arc45 23.04,51.8 23.01,51.83 arc45 22.24,52.15 19.63,52.15 arc-45 18.64,52.56 18.47,52.73 arc-45 17.98,53.91 arc45 17.42,55.27 17.41,55.28 arc45 16.73,55.56 15.41,55.56 arc45 14.59,55.22 14.49,55.12 14.49,54.52 arc45 JMP2.2
  Bottom 0.4: J2.4 arc45 14.5,50.79 JMP2.2
N$49  (via drill 0.35)
  Top 0.7: U$11.1 JMP8.2 26.5,11.14 arc-45 C32.2
  other vias: 26.5,7
N$59  (1 unrouted)
  Top 2: J9.1 7,68.47 arc-45 7.74,70.27 D5.A
N$71
  Top 0.28: U3.15 84.48,68.62 arc45 85.56,69.08 | 86.47,69.98 arc45 87.21,71.77 87.21,72.59 arc45 86.74,73.72 86.6,73.86 arc45 85.15,74.46 U$20.P$2
  Top 0.4: U3.15 84.48,68.62 arc45 85.56,69.08 86.47,69.98 arc45 87.21,71.77
N$72
  Top 0.28: 84.34,67.97 arc45 86.14,68.72 | 88,71.63 arc-45 87.26,69.84
  Top 0.4: U3.14 84.34,67.97 arc45 86.14,68.72 87.26,69.84 arc45 88,71.63 U$22.P$2
N$76
  Top 0.4: 84.55,69.28 U3.16 84.56,69.28 arc45 85.27,69.57 85.36,69.66 arc45 85.53,70.07 arc45 85.35,70.5 85.25,70.6 arc45 84.79,70.79 78.44,70.79 arc-45 77.33,71.25 77.07,71.51 arc-45 76.66,72.5 76.66,76.67 arc45 76.05,78.15 arc45 74.77,78.68 63.63,78.68 arc45 62.48,78.2 arc45 61.63,76.16 61.63,74.33 arc-45 61.33,73.6 61.04,73.31 arc-45 60.29,73 LS1.-
  Top 0.7: D3.A 58.76,67.11 arc45 59.5,68.9 U$19.- 59.5,72.4 arc45 LS1.-
N$77
  Top 0.7: LS1.+ arc45 52.5,72.4 U$19.+ 52.5,68.9 arc45 53.24,67.11 D3.C 54.85,64.22 arc45 R40.1
N$78  (via drill 0.35)
  Top 1.5: D4.A 96.83,43.02 arc-45 U$21.P$2
  Bottom 1: Q1.3 arc-45 87.27,43.02 D4.A
  other vias: 86,42.5 92,43.02
N$79
  Top 1: R41.1 84.2,35 arc-45 Q1.1 arc-45 83.6,35.15 R42.1
PA0
  Top 0.28: U1.10 54,40.75
PA8
  Top 0.28: U1.29 64.75,41.75
PA11
  Top 0.28: U1.32 64.72,43.25 64.72,43.26
PA12
  Top 0.28: U1.33 64.73,43.75
PA13  (via drill 0.35)
  Top 0.28: v60.54,42.98 61.07,43.51 arc-45 62.86,44.25 U1.34 64.73,44.25
  Top 0.4: R5.2 53.62,52.5 arc45 55,53.07 arc45 55.58,54.47 U$3.3
  Bottom 0.28: v60.54,42.98 61.08,43.52 arc-45 62.87,44.26 64.37,44.26 arc45 64.97,44.51 65.26,44.8 arc45 65.6,45.62 65.6,51.47 arc45 64.95,53.04 arc45 63.43,53.67 56.2,53.67 arc-45 55.71,53.87 arc-45 55.58,54.18 U$3.3
PA14  (via drill 0.35)
  Top 0.28: v58.54,42.8 58.59,42.8 arc45 58.83,42.9 59.69,43.76 arc-45 60.97,44.29 | 60.97,44.29 61.02,44.29 | 60.97,44.29 arc45 61.94,44.69 arc45 62.22,45.36 62.22,46.65 U1.37 62.22,46.71 62.22,48.25
  Top 0.4: U$3.2 53.04,56.28 arc-45 53.38,57.1 arc-45 54.35,57.5 R4.2
  Bottom 0.28: v58.54,42.8 58.55,42.81 arc45 58.86,42.94 59.77,43.85 arc-45 60.79,44.27 60.85,44.27 arc45 62.01,44.75 arc45 62.23,45.28 62.23,51.45 arc45 62.07,51.84 61.74,52.17 arc45 60.55,52.66 55.93,52.66 arc-45 53.37,53.72 arc-45 53.04,54.52 U$3.2
PA15
  Top 0.28: U1.38 61.75,48.25
PB3
  Top 0.28: U1.39 61.25,48.25
PB4
  Top 0.28: U1.40 60.75,48.25
PB5
  Top 0.28: U1.41 60.25,48.25
PB8
  Top 0.28: U1.45 58.25,48.25
PB9
  Top 0.28: U1.46 57.75,48.25
PB12
  Top 0.28: U1.25 66.19,39.75 arc45 66.94,40.06 arc45 67.36,41.07 67.36,60.26 arc-45 68.17,62.22 arc-45 70.08,63.01 74.55,63.01 arc45 75.54,63.42 arc45 76.07,64.7 76.07,76.08 arc45 75.78,76.78 75.71,76.85 arc45 75.11,77.1 U$15.3
PB13
  Top 0.28: U1.26 65.8,40.25 arc45 66.61,40.59 arc45 66.92,41.33 66.92,60.31 arc-45 67.9,62.67 arc-45 69.81,63.46 74.23,63.46 arc45 75.17,63.85 arc45 75.6,64.89 75.6,72.72 arc45 75.18,73.73 arc45 74.29,74.1 U$14.3
PB14
  Top 0.28: U1.27 65.61,40.75 arc45 66.22,41 arc45 66.48,41.62 66.48,60.69 arc-45 67.41,62.93 arc-45 69.79,63.92 73.97,63.92 arc45 74.83,64.28 arc45 75.15,65.05 75.15,70.19 arc45 74.9,70.79 arc45 74.15,71.1 U$13.3
PB15
  Top 0.28: U1.28 65.37,41.25 arc45 65.84,41.45 arc45 66.04,41.92 66.04,61.01 arc-45 67,63.33 arc-45 69.51,64.37 73.45,64.37 arc45 74.46,64.79 arc45 74.7,65.37 74.7,67.15 arc45 74.45,67.76 arc45 73.63,68.1 U$9.3
PC13
  Top 0.28: U1.2 52.07,44.75 arc-45 51.47,45 51.4,45.07 arc-45 50.99,46.06 50.99,47.15 arc45 50.41,48.55 49.62,49.34 arc45 47.83,50.08 45.53,50.08 arc45 44.23,49.54 43.19,48.5 arc-45 41.74,47.9 40.54,47.9 arc45 39.25,47.37 arc45 38.73,46.11 38.73,37.02 arc-45 38.38,36.17 33.5,31.29 arc45 32.76,29.5 32.76,25.41 arc-45 32.64,25.12 arc45 31.93,23.41 31.93,20.15 arc45 32.41,18.99 arc45 33.16,18.68 41.28,18.68 arc45 43.07,19.42 R21.2
PC14
  Top 0.28: U1.3 51.47,44.25 arc-45 51.03,44.43 50.79,44.67 arc-45 50.53,45.3 50.53,46.76 arc45 49.79,48.55 49.3,49.04 arc45 48,49.58 45.63,49.58 arc45 44.37,49.06 43.51,48.2 arc-45 41.72,47.46 40.71,47.46 arc45 39.61,47.01 arc45 39.18,45.97 39.18,37.16 arc-45 39.18,37.03 arc-45 38.59,35.61 33.94,30.96 arc45 33.2,29.17 33.2,25.4 arc-45 32.96,24.82 arc45 32.37,23.4 32.37,20.86 arc45 32.61,20.28 arc45 33.29,20 R14.2
PC15
  Top 0.28: U1.4 51.28,43.75 arc-45 50.51,44.07 arc-45 50.01,45.28 50.01,46.64 arc45 49.27,48.43 49.18,48.52 arc45 47.8,49.09 arc45 47.78,49.1 46.04,49.1 arc45 44.35,48.4 43.7,47.75 arc-45 41.91,47.01 40.85,47.01 arc45 39.98,46.65 arc45 39.65,45.85 39.65,37.01 arc-45 38.91,35.22 34.39,30.7 arc45 33.65,28.91 R23.2
RST
  Top 0.28: U1.7 50.72,42.25 arc45 48.93,41.51 47.24,39.82 arc45 46.5,38.03 S1.2
  Top 0.4: R3.1 C1.1 43.01,31.86 arc-45 44.8,32.6 S1.2
RX1
  Top 0.28: U1.31 64.93,42.75 arc45 65.16,43.31 65.16,47.9 arc45 64.47,49.57 64.42,49.62 arc45 62.24,50.52 45.43,50.52 arc45 43.98,49.92 42.86,48.8 arc-45 41.78,48.35 40.42,48.35 arc45 39.04,47.78 38.91,47.65 arc45 38.29,46.15 38.29,37.01 arc-45 38.1,36.55 33.05,31.5 arc45 32.31,29.71 32.31,28.73 arc-45 32.06,28.13 arc-45 31.5,27.9 20.17,27.9 arc45 19.51,27.63 arc45 19.22,26.93 19.22,15.66 arc45 19.95,13.9 23.06,10.79 arc-45 23.95,8.64 23.95,3.85 arc45 24.48,2.56 arc45 26.12,1.88 46.92,1.88 arc45 48.61,2.58 arc45 49.08,3.71 U$12.3
RX2  (via drill 0.35)
  Top 0.28: JMP6.3 28.88,23.3 arc-45 30.67,22.56 30.71,22.52 arc-45 31.02,21.77 31.02,19.88 arc45 31.57,18.55 31.98,18.14 arc45 32.88,17.77 48.44,17.77 arc45 49.6,18.25 49.89,18.54 arc45 50.51,20.03 50.51,25.8 arc45 50.22,26.5 49.84,26.88 arc-45 49.64,27.36 49.64,34.64 arc-45 49.95,35.39 arc-45 50.92,35.79 55.96,35.79 arc45 56.42,35.98 arc45 56.75,36.78 U1.13 | U$11.3 31.08,3.5 arc-45 29.29,2.76 26.19,2.76 arc-45 25.13,3.2 arc-45 24.85,3.88 24.85,9.2 arc45 24.11,10.99 20.89,14.21 arc-45 20.15,16 20.15,22.83 arc-45 20.3,23.19 arc-45 20.57,23.3 JMP6.3 | 20.89,23.19 JMP6.3
  Bottom 0.305: JMP7.1 JMP6.3
  other vias: 17.5,23.3 21,23.3
S$1  (via drill 0.35)
  other vias: 86.78,28.93
S$2  (via drill 0.35)
  other vias: 87.7,29.02
S$3  (via drill 0.35)
  other vias: 86.79,14.95
S$4  (via drill 0.35)
  other vias: 87.76,15.04
S$5  (via drill 0.35)
  other vias: 86.82,42.96
S$6  (via drill 0.35)
  other vias: 87.82,43.04
S$7  (via drill 0.35)
  other vias: 86.57,56.63
S$8  (via drill 0.35)
  other vias: 87.5,56.98
SCL1  (via drill 0.35)
  Top 0.28: U1.42 59.75,46.03 | U1.42 59.75,45.74 arc-45 59.01,43.95 58.95,43.89 arc-45 57.16,43.15 v56.63,43.15 | U1.42 59.75,48.25
  Bottom 0.28: v56.63,43.15 47.68,43.15 arc-45 44.83,44.33 44.42,44.73 arc-45 42.77,48.73 42.77,52.75 arc45 42.02,54.56 arc45 39.56,55.58 34.2,55.58 arc45 33.76,55.4 33.61,55.25 arc45 JMP1.1 33.3,54.74
SCL2/TX3  (via drill 0.35)
  Top 0.28: v57.46,40.31 59.42,40.31 arc-45 60.41,39.9 arc-45 60.75,39.08 U1.21 60.75,37
  Bottom 0.28: U$7.4 68.46,4.66 arc-45 67.72,6.45 67.72,27.08 arc45 66.98,28.87 61.47,34.38 arc-45 60.73,36.17 60.73,38.91 arc45 60.27,40.02 arc45 59.57,40.31 v57.46,40.31 57.44,40.33 50.26,40.33 arc-45 46.75,41.78 43.82,44.71 arc-45 42.33,48.31 42.33,52.73 arc45 41.7,54.26 arc45 39.6,55.13 36.7,55.13 JMP1.3
SDA1  (via drill 0.35)  (1 unrouted)
  Top 0.28: v56.63,44.07 57.41,44.07 arc45 58.64,44.58 arc45 59.25,46.05 U1.43 59.25,48.25
  Bottom 0.28: v56.63,44.07 46.77,44.07 arc-45 45.18,44.73 44.59,45.32 arc-45 43.21,48.65 43.21,52.97 arc45 42.47,54.76 41.95,55.28 arc45 40.16,56.02 14.73,56.02 arc45 12.94,55.28 12.84,55.18
SDA2/RX3  (via drill 0.35)
  Top 0.28: v58.13,40.98 59.31,40.98 arc-45 60.76,40.38 arc-45 61.25,39.2 U1.22 61.25,37
  Bottom 0.28: v58.13,40.98 59.43,40.98 arc-45 60.66,40.47 arc-45 61.25,39.05 61.25,36.32 arc45 61.99,34.53 67.47,29.05 arc-45 68.21,27.26 68.21,6.71 arc45 68.54,5.91 arc45 69.19,5.64 69.24,5.64 arc-45 70.35,5.18 arc-45 70.77,4.17 70.77,3.64 arc-45 70.43,2.82 arc-45 69.51,2.44 69.19,2.44 arc-45 67.4,3.18 U$7.3 64.72,2.14 arc-45 62.93,1.4 16.54,1.4 arc-45 14.75,2.14 13.98,2.91 arc-45 13.5,4.07 13.5,45.44 arc-45 14.24,47.23 14.94,47.93 arc45 15.64,49.62 15.64,53.15 arc-45 JMP2.3
TX1
  Top 0.28: U1.30 65.22,42.25 arc45 65.39,42.32 arc45 65.6,42.83 65.6,47.86 arc45 64.69,50.05 arc45 62.5,50.96 45.44,50.96 arc45 43.65,50.22 42.64,49.21 arc-45 41.62,48.79 40.42,48.79 arc45 38.73,48.09 38.51,47.87 arc45 37.85,46.28 37.85,37.13 arc-45 37.71,36.79 32.43,31.51 arc45 31.87,30.15 31.87,29.07 arc-45 31.65,28.53 arc-45 31.21,28.35 20.04,28.35 arc45 19.09,27.96 arc45 18.71,27.04 18.71,15.57 arc45 19.45,13.78 22.77,10.46 arc-45 23.51,8.67 23.51,3.76 arc45 24.16,2.19 arc45 26.03,1.42 48.45,1.42 arc45 51.18,2.55 51.27,2.64 arc45 51.62,3.48 U$12.4
TX2  (via drill 0.35)
  Top 0.28: U1.12 51.35,39.75 arc45 50.34,39.33 50.29,39.28 arc45 49.18,36.59 49.18,27.19 arc45 49.4,26.66 49.91,26.15 arc-45 50.06,25.79 50.06,20.22 arc-45 49.43,18.7 arc-45 48.3,18.23 33.18,18.23 arc-45 32.1,18.68 31.91,18.87 arc-45 31.48,19.91 31.48,24.7 arc45 31.06,25.71 30.81,25.96 arc45 29.02,26.7 JMP6.1 20.7,26.7 arc45 20.05,26.43 arc45 19.71,25.61 19.71,15.66 arc45 20.34,14.14 23.67,10.81 arc-45 24.41,9.02 24.41,3.74 arc45 24.74,2.93 arc45 26.22,2.32 30.85,2.32 arc45 33.56,3.44 U$11.4
  Bottom 0.305: JMP7.3 JMP6.1
  other vias: 17.5,26.7 21,26.7
UL2
  Top 0.28: U1.14 57.25,36.82 arc45 57.99,35.03 58.2,34.82 arc45 59.99,34.08 68.1,34.08 arc45 69.57,34.69 70.11,35.23 arc45 70.46,36.07 70.46,59.34 arc-45 70.63,59.75 arc-45 71.04,59.92 79.68,59.92 arc45 81.02,60.48 arc45 82.04,62.93 82.04,66.13 arc45 81.24,68.06 arc45 79.87,68.62 U3.2
UL3
  Top 0.28: U1.15 57.75,36.91 arc45 58.47,35.17 arc45 60.02,34.53 67.93,34.53 arc45 69.35,35.12 69.52,35.29 arc45 70.02,36.49 70.02,59.7 arc-45 70.21,60.16 arc-45 70.69,60.36 79.68,60.36 arc45 80.69,60.78 arc45 81.59,62.95 81.59,65.68 arc45 80.89,67.38 arc45 79.45,67.97 U3.3
VBAT
  Top 0.28: U1.1 54,45.25
VCC  (via drill 0.35)
  Top 0.4: C6.1 26.65,58.06 arc-45 U4.3
  Top 1: C12.+ 20.82,65.05 arc-45 22.62,64.31 U4.3 | 41.47,76.4 40.6,76.4 arc45 38.81,75.66 C3.1 36.22,76.63 arc45 34.42,77.38 U6.4 | 41.47,76.4 C7.+ 46.41,76.4 arc-45 48.2,75.66 48.76,75.1 arc-45 49.43,73.48 49.43,70.24 arc-45 48.83,68.79 48.63,68.59 arc-45 47.09,67.95 45.29,67.95 arc45 43.84,67.35 43.39,66.9 arc45 42.65,65.11 R6.2 | U6.2 arc45 33.53,69.35 33.94,68.94 arc45 35.73,68.2 38.99,68.2 arc45 40.78,68.94 41.1,69.26 arc45 41.47,70.15 41.47,76.4
  Bottom 0.4: JMP8.3 29.05,6.15 arc45 30.4,5.59 43.95,5.59 | 43.95,5.59 arc45 45.57,6.26 arc45 45.7,6.57 JMP9.3 | 43.95,5.59 61.56,5.59 arc45 63.01,6.19 arc45 63.2,6.65 JMP10.3 | JMP5.3 C6.1 | U4.3 32.26,64.58 arc45 33,66.38 U6.2
  Bottom 1: v63.01,7 JMP10.3 63.35,7 arc45 65.14,7.74 65.58,8.18 arc45 66,9.19 C4.1 53.69,12.6 arc-45 53.13,12.83 52.39,13.57 arc-45 51.65,15.36 51.65,19.87 arc45 51.41,20.45 50.82,21.04 arc45 49.03,21.78 33.5,21.78 arc-45 31.71,22.52 31.1,23.13 arc-45 30.36,24.92 30.36,42.11 arc45 29.27,44.75 arc45 26.63,45.84 6.46,45.84 arc-45 3.7,46.98 arc-45 2.58,49.68 2.58,50.51 arc-45 3.69,53.19 15.04,64.54 arc-45 16.27,65.05 C12.+
  other vias: 26.65,54.5 27.3,59.62 33,70.62 66,12.6 17,65.05
VIN  (via drill 0.35)
  Top 0.4: U3.9 84.96,64.72 arc-45 86.18,64.22 88.97,61.43 arc-45 89.71,59.64 89.71,51.04 arc45 89.82,50.78 | Q3.2 89.5,22.42 arc-45 90.13,22.68 arc-45 89.92,22.17 89.82,22.07
  Top 1: U$20.P$1 U$22.P$1 | C10.+ 25.4,76.4 arc-45 27.19,75.66 C9.1 30.02,74.85 arc-45 31.82,74.11 U6.3 | Q5.2 arc-45 88.31,49.27 89.82,50.78 | D7.C v92,52.96 89.82,50.78 | 89.78,36.7 Q1.2 arc-45 87.8,35 | 89.78,36.7 91.96,38.88 arc45 D4.C | D2.C Q3.2 arc-45 87.8,21 | 90.01,8.95 Q4.2 arc-45 87.8,7 | 90.01,8.95 D6.C | 89.82,50.78 89.82,36.96 | 89.78,36.7 arc45 89.82,36.8 89.82,36.96 arc-45 89.82,36.96 | 90.01,8.95 90.01,22.53 | 90.01,22.53 89.82,22.07 89.82,36.96 | 90.01,22.53 arc-45 90.04,22.61 | R41.2 87.8,35 | R15.2 87.8,21 | R17.2 87.8,7 | R19.2 87.8,49 arc45 Q5.2 | C18.+ 78.31,47.74 arc45 80.1,47 85.03,47 arc45 86.82,47.74 Q5.2 | C29.+ 78.3,33.75 arc45 80.09,33.01 84.75,33.01 arc45 86.55,33.75 87.8,35 | C14.+ 78.3,19.75 arc45 80.09,19.01 84.75,19.01 arc45 86.55,19.75 87.8,21 | C16.+ 77.05,8.52 arc45 78.11,5.97 arc45 80.04,5.17 85.04,5.17 arc45 86.62,5.83 87.8,7 | D5.C arc-45 14.8,73.7 Q6.S
  Top 2: D5.C 17.18,75.66 arc-45 18.98,76.4 C10.+
  Bottom 0.4: U6.3 41.68,64.24 arc45 43.48,63.5 R40.2
  Bottom 1: R40.2 75.07,63.5 arc-45 76.86,62.76 77.37,62.25 arc-45 77.74,61.36 77.74,50.67 arc-45 C18.+ | v92,52.96 93.83,54.79 arc45 94.57,56.58 94.57,72.9 arc45 93.37,75.8 arc45 90.47,77 U$22.P$1
  other vias: 56.85,63.5 77.05,49 35.3,70.62
  pour Top: 82.54,81.28 82.54,59.2 75.77,59.2 75.77,-1.68 99.26,-1.68 102.03,-1.68 102.03,6.18 102.03,81.28